# Altium PCB PSU.PcbDoc
Units mm, origin at the board's own origin, x right, y up, seen from the top; angles counter-clockwise.
Board outline 56 x 56 mm, 2 copper layers (Top Layer, Bottom Layer); 48 components, 28 nets, 158 pads, 215 vias.
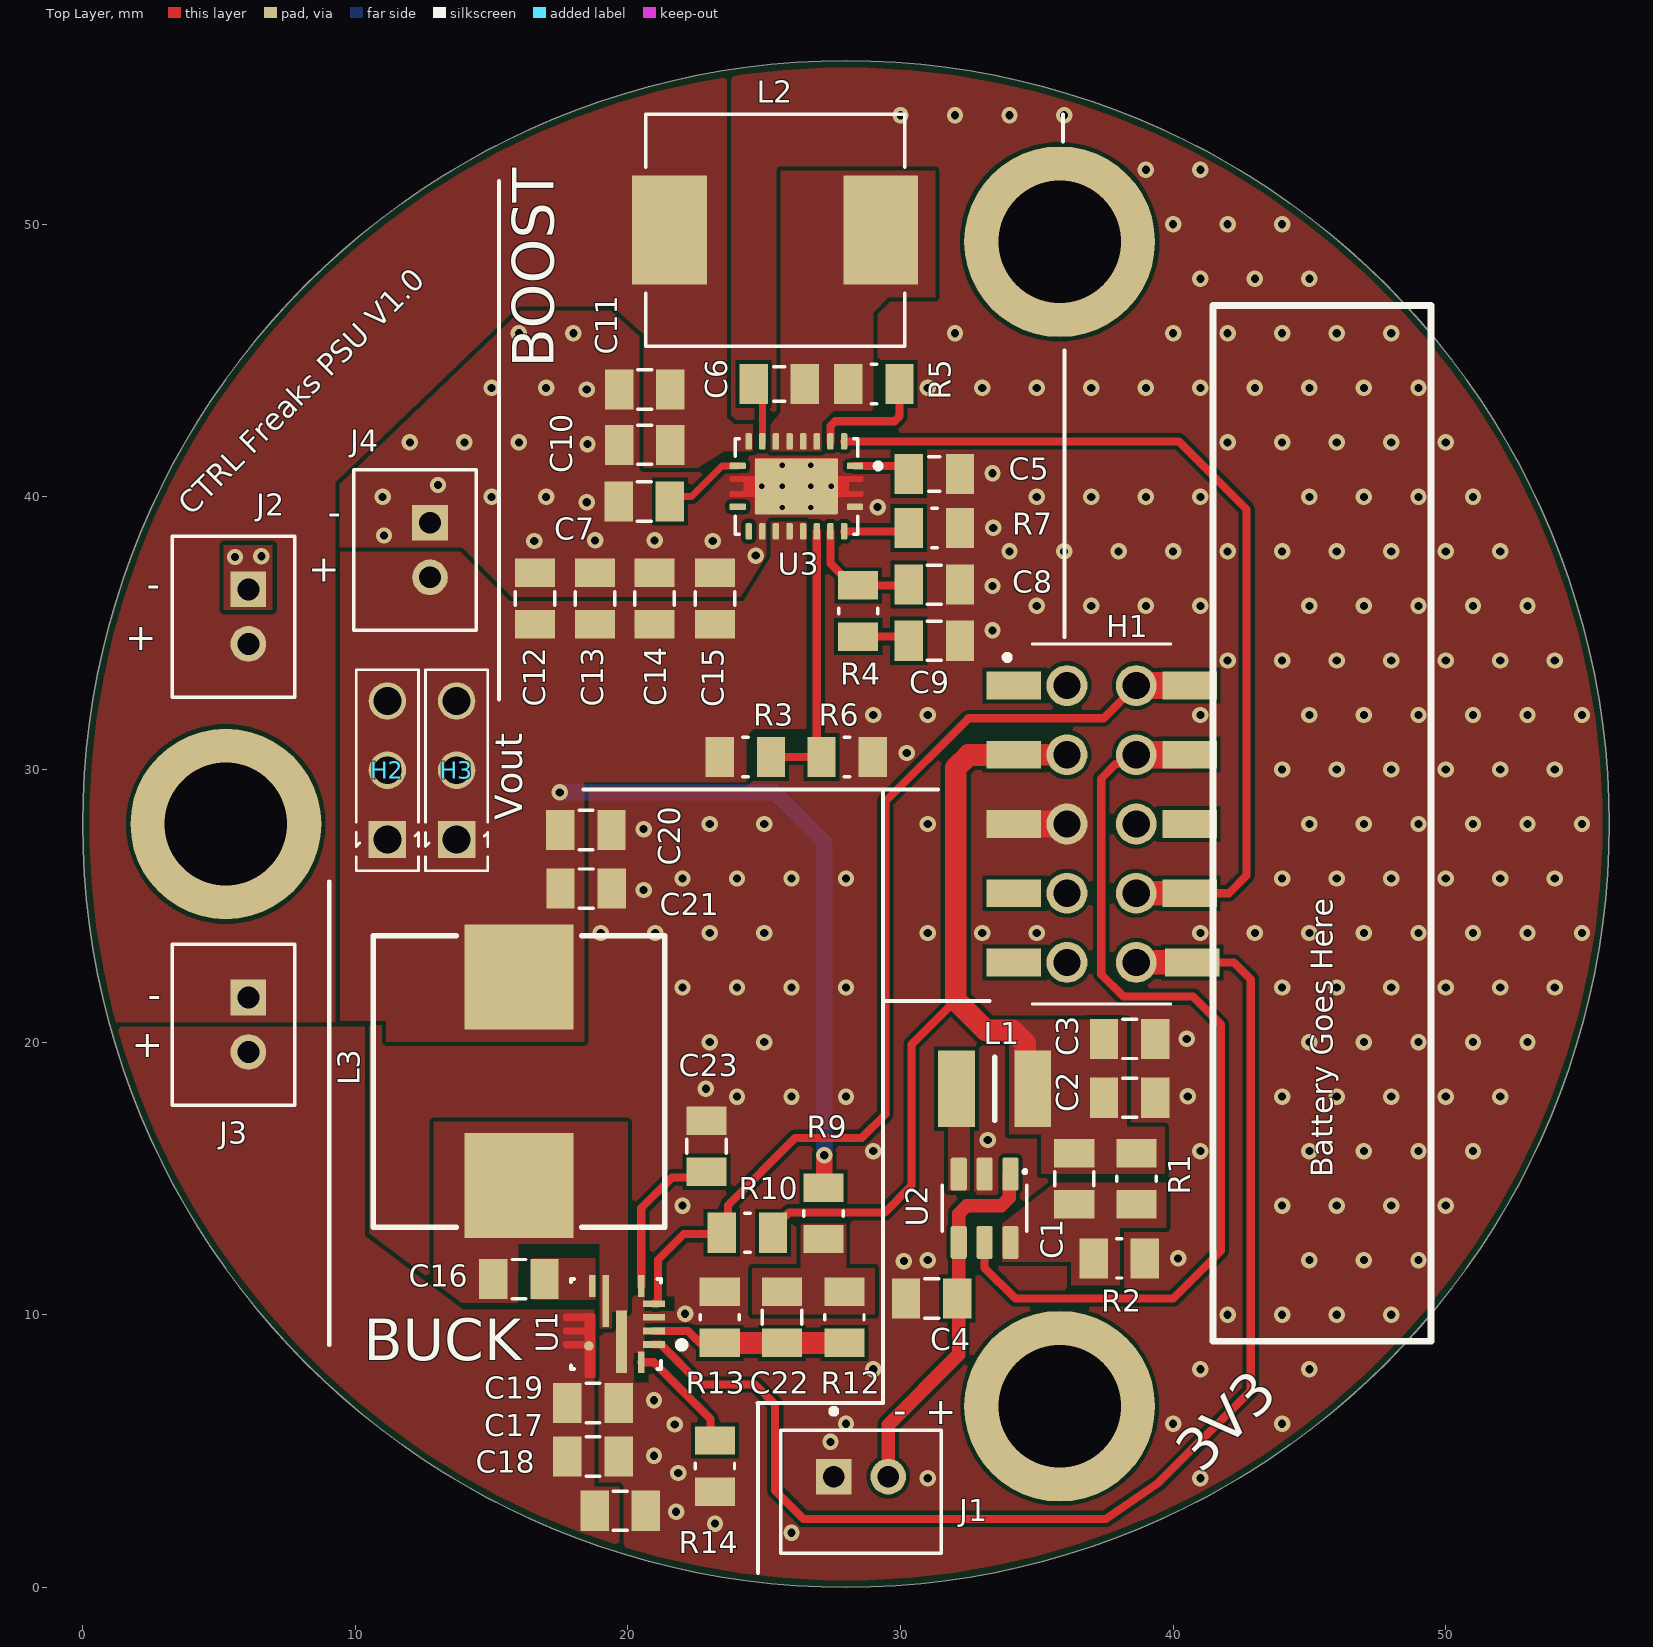
[diagram p0: Top Layer view]
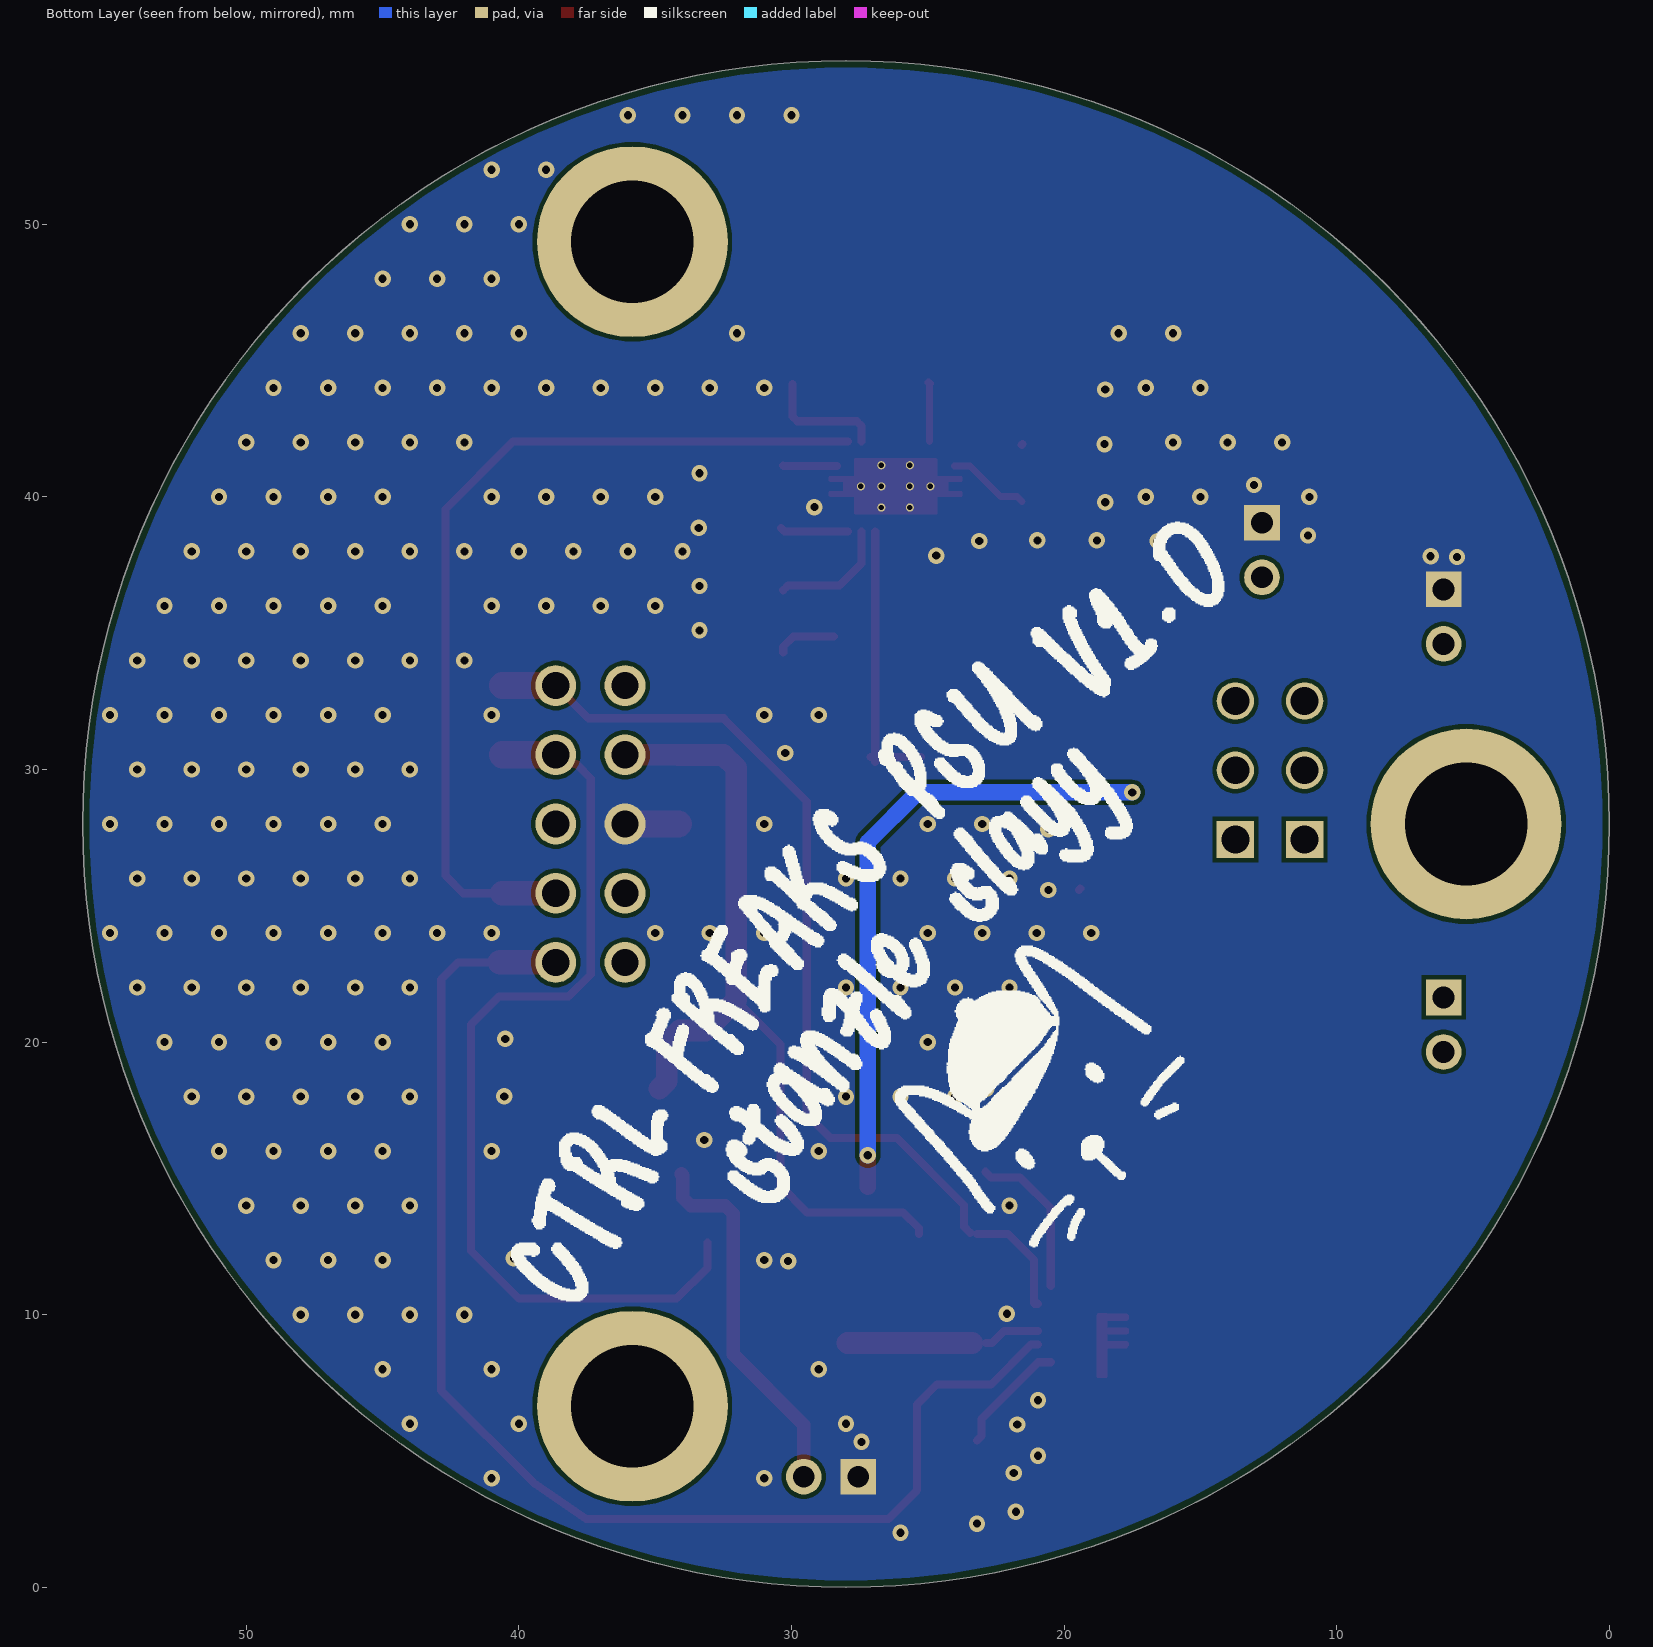
[diagram p1: Bottom Layer view, seen from below]
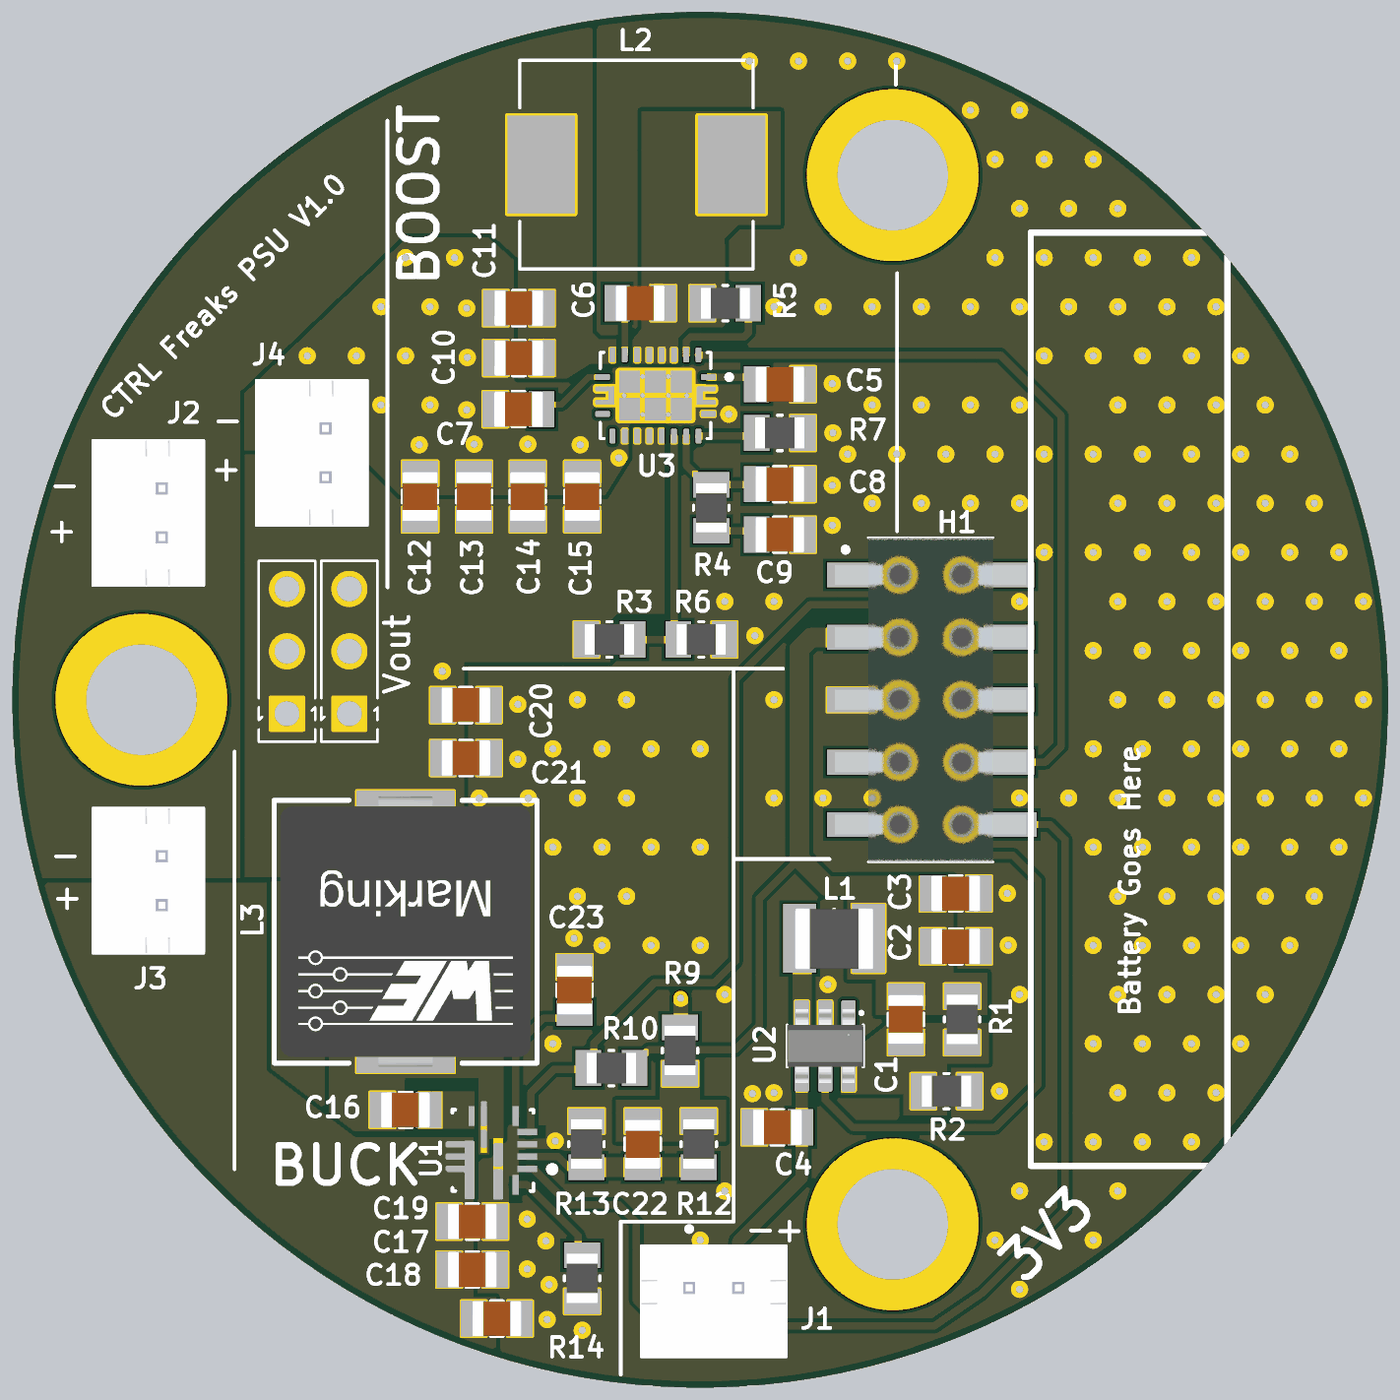
[diagram p2: 3D render of the assembled board from above, using the file's embedded part models]

## Layer stack, top to bottom
Top Solder: solder mask 0.0102, Solder Resist, Dk 3.5
Top Layer: signal copper 0.0356
Dielectric 1: dielectric 0.32, FR-4, Dk 4.8
Bottom Layer: signal copper 0.0356
Bottom Solder: solder mask 0.0102, Solder Resist, Dk 3.5

## Board outline
28,0 cw(c28,28) 0,28 cw(c28,28) 28,56 cw(c28,28) 56,28 cw(c28,28)

## Design rules (kind name [scope] priority, off if disabled: settings)
BoardOutlineClearance [All] p1: gap=0.254 ignorepadtopadclearanceinfootprint=FALSE except(0: Arc-SplitContinuation Track-SplitContinuation SMDPad-SplitContinuation THPad-SplitContinuation Via-SplitContinuation Fill-SplitContinuation Poly-SplitContinuation Region-SplitContinuation Text-SplitContinuation)
Clearance [All] p1: gap=0.152 ignorepadtopadclearanceinfootprint=FALSE
HoleSize [All] p1: absolutevalues=TRUE maxlimit=6.2 minlimit=0.3 maxpercent=80.000 minpercent=20.000
MinimumAnnularRing [All] p1: minimumring=0.15
MinimumSolderMaskSliver [All] p1: minsoldermaskwidth=0.1
PolygonConnect ViaConnect [IsVia] p1: connectstyle=Direct reliefconductorwidth=0.254 reliefentries=4 polygonreliefangle="90 Angle" airgapwidth=0.254
PolygonConnect [All] p2: connectstyle=Direct reliefconductorwidth=0.6 reliefentries=4 polygonreliefangle="90 Angle" airgapwidth=0.15
RoutingVias [All] p1: holewidth=0.3 width=0.6 viastyle="Through Hole" minholewidth=0.3 minwidth=0.5 maxholewidth=1 maxwidth=5
SilkToSilkClearance [All] p1: silktosilkclearance=0.1
SilkToSolderMaskClearance [IsPad] p1: minsilkscreentomaskgap=0.1 clearancetoexposedcopper=TRUE
SolderMaskExpansion [All] p1: expansion=0.051 istentingtop=FALSE
SupplyNets "Schematic Supply Nets_3" [InNet('Vout')] p1: voltage=0.000
SupplyNets "Schematic Supply Nets_7" [InNet('Vbat_3V7')] p2: voltage=0.000
SupplyNets "Schematic Supply Nets_6" [InNet('7V4')] p3: voltage=0.000
SupplyNets "Schematic Supply Nets_5" [InNet('3V7')] p4: voltage=0.000
SupplyNets "Schematic Supply Nets_1" [InNet('GND')] p5: voltage=0.000
SupplyNets "Schematic Supply Nets" [InNet('3V3')] p6: voltage=0.000
Width [All] p1: maxlimit=25.4 minlimit=0.15 preferedwidth=0.3
26 further rules are at their usual default settings.

## Classes and differential pairs
component class Main: C1 C2 C3 C4 C5 C6 C7 C8 C9 C10 C11 C12 C13 C14 C15 C16 C17 C18 C19 C20 C21 C22 C23 H1 H2 H3 J1 L1 L2 L3 R1 R2 R3 R4 R5 R6 R7 R9 R10 R12 R13 R14 U1 U2 U3

## Components (designator, comment, footprint, x,y, rotation, side; value= is the part's Value field where it differs from the comment)
C1 "22pF" CAPACITOR_0805_2012M-70N 36.373,14.986 r90 top
C2 "22uF" CAPACITOR_0805_2012M-70N 38.405,17.958 r180 top
C3 "22uF" CAPACITOR_0805_2012M-70N 38.405,20.117 r180 top
C4 "22uF" CAPACITOR_0805_2012M-70N 31.14,10.592 r0 top
C5 "2.2uF" CAPACITOR_0805_2012M-70N 31.242,40.843 r180 top
C6 "0.1uF" CAPACITOR_0805_2012M-70N 25.552,44.145 r180 top
C7 "47nF" CAPACITOR_0805_2012M-70N 20.6,39.827 r180 top
C8 "?" CAPACITOR_0805_2012M-70N 31.242,36.779 r0 top
C9 "?" CAPACITOR_0805_2012M-70N 31.242,34.722 r0 top
C10 "10uF" CAPACITOR_0805_2012M-70N 20.616,41.91 r180 top
C11 "0.1uF" CAPACITOR_0805_2012M-70N 20.616,43.942 r180 top
C12 "1uF" CAPACITOR_0805_2012M-70N 16.593,36.273 r90 top
C13 "22uF" CAPACITOR_0805_2012M-70N 18.789,36.273 r90 top
C14 "22uF" CAPACITOR_0805_2012M-70N 20.975,36.273 r90 top
C15 "22uF" CAPACITOR_0805_2012M-70N 23.194,36.273 r90 top
C16 "0.1uF" CAPACITOR_0805_2012M-70N 16.002,11.303 r180 top
C17 "10uF" CAPACITOR_0805_2012M-70N 18.72,4.801 r0 top
C18 "10uF" CAPACITOR_0805_2012M-70N 19.719,2.807 r0 top
C19 "0.1uF" CAPACITOR_0805_2012M-70N 18.72,6.756 r0 top
C20 "22uF" CAPACITOR_0805_2012M-70N 18.459,27.78 r0 top
C21 "22uF" CAPACITOR_0805_2012M-70N 18.466,25.629 r0 top
C22 "150pF" CAPACITOR_0805_2012M-70N 25.654,9.906 r90 top
C23 "47nF" CAPACITOR_0805_2012M-70N 22.885,16.18 r90 top
H1 "RS2BE-10-G-SMT" RS2BE10GSMT 37.377,28 r270 top locked
H2 "HDR,2.54mm,1x3" HEADER_2.54MM_1x3PIN 11.176,29.972 r90 top locked
H3 "HDR,2.54mm,1x3" HEADER_2.54MM_1x3PIN 13.716,29.972 r90 top locked
J1 "B2B-PH-K-S(LF)(SN)" JST_B2B-PH-K-S(LF)(SN) 28.55,3.505 r180 top
J2 "B2B-PH-K-S(LF)(SN)" JST_B2B-PH-K-S(LF)(SN) 5.528,35.607 r90 top
J3 "B2B-PH-K-S(LF)(SN)" JST_B2B-PH-K-S(LF)(SN) 5.528,20.636 r90 top
J4 "B2B-PH-K-S(LF)(SN)" JST_B2B-PH-K-S(LF)(SN) 12.19,38.05 r90 top
L1 "DFE322520F-2R2M=P2" INDC3225X200N 33.452,18.288 r0 top
L2 "CDMC8D28NP1R2MC" IND_CDMC8D28NP1R2MC 25.4,49.784 r0 top
L3 "3.3µH, 16.6A" WE-HCI_1050 16.002,18.557 r180 top
R1 "450k" RESISTOR_0805_2012M-50N 38.659,14.986 r90 top
R2 "100k" RESISTOR_0805_2012M-50N 38.024,12.065 r180 top
R3 "360k" RESISTOR_0805_2012M-50N 24.307,30.455 r180 top
R4 "?" RESISTOR_0805_2012M-50N 28.448,35.814 r270 top
R5 "255k" RESISTOR_0805_2012M-50N 29.022,44.145 r0 top
R6 "56k" RESISTOR_0805_2012M-50N 28.041,30.455 r180 top
R7 "100k" RESISTOR_0805_2012M-50N 31.242,38.862 r0 top
R9 "49.9" RESISTOR_0805_2012M-50N 27.178,13.716 r90 top
R10 "100k" RESISTOR_0805_2012M-50N 24.384,13.005 r0 top
R12 "73.2k" RESISTOR_0805_2012M-50N 27.94,9.906 r90 top
R13 "10k" RESISTOR_0805_2012M-50N 23.368,9.906 r270 top
R14 "52.3k" RESISTOR_0805_2012M-50N 23.19,4.445 r270 top
U1 "TPS56A37RPAR" RPA0010A-MFG 19.558,9.652 r180 top
U2 "AP3445LW6-7" SOT23-6N-1.4mm 33.086,13.904 r270 top
U3 "TPS61088RHLR" IC_TPS61088RHLR 26.179,40.386 r270 top

## Footprints (in the part's own frame and the unit in brackets; to place one, negate y for a bottom-side part, rotate by r counter-clockwise, add the part's x,y. Pads: shape width x height; smd on the part's side, far side on the other; paste and mask are expansions set on the pad)
CAPACITOR_0805_2012M-70N [mm] "Capacitor, 0805 (2012 metric), 0.7mm high, nominal pads,"
  rect 1.04x1.47 smd mask+0.051: 1(-0.94,0) 2(0.94,0)
  silkscreen extent -0.25,-0.72 0.25,0.72, body extent -1,-0.73 1,0.73, height 1.23
HEADER_2.54MM_1x3PIN [mm]
  rect 1.37x1.37 hole 1.02: 1(-2.54,0)
  round 1.37 hole 1.02: 2(0,0) 3(2.54,0)
  silkscreen extent -3.68,-1.14 3.68,1.14, body extent -3.68,-1.14 3.68,1.14, height 8.2
IC_TPS61088RHLR [mm]
  rrect42% 0.24x0.6 smd: 1(-0.75,2.15) 10(-0.75,-2.15) 11(0.75,-2.15) 20(0.75,2.15)
  rrect42% 0.6x0.24 smd: 2(-1.65,1.75) 3(-1.65,1.25) 4(-1.65,0.75) 5(-1.65,0.25) 6(-1.65,-0.25) 7(-1.65,-0.75) 8(-1.65,-1.25) 9(-1.65,-1.75) 12(1.65,-1.75) 13(1.65,-1.25) 14(1.65,-0.75) 15(1.65,-0.25) 16(1.65,0.25) 17(1.65,0.75) 18(1.65,1.25) 19(1.65,1.75)
  rrect5% 2.05x3.05 smd paste-3: 21(0,0)
  round 0.3 hole 0.2: 22(0,1.275) 23(-0.775,0.525) 24(0,0.525) 25(0.775,0.525) 26(-0.775,-0.525) 27(0,-0.525) 28(0.775,-0.525) 29(0,-1.275)
  Top Layer region: 381 vertices and 0 holes, not listed, extent -1.025,-2.45 1.025,2.45
  silkscreen extent -1.75,-2.25 1.75,3.1
IND_CDMC8D28NP1R2MC [mm]
  rect 2.75x4 smd paste+0 mask+0.102: 1(-3.875,0) 2(3.875,0)
  silkscreen extent -4.75,-4.25 4.75,4.25
INDC3225X200N [mm]
  rect 1.35x2.8 smd: 1(-1.4,0) 2(1.4,0)
  silkscreen extent 0,-1.15 0,1.15, body extent -1.6,-1.27 1.6,1.23, height 2
JST_B2B-PH-K-S(LF)(SN) [mm]
  rect 1.308x1.308 hole 0.8: 1(1,-0.55)
  round 1.308 hole 0.8: 2(-1,-0.55)
  silkscreen extent -2.95,-3.05 2.95,2.25, body extent -2.95,-2.25 2.95,2.25, height 6
RESISTOR_0805_2012M-50N [mm] "Resistor, 0805 (2012 metric), nominal pads"
  rect 1.04x1.47 smd mask+0.051: 1(-0.94,0) 2(0.94,0)
  silkscreen extent -0.1,-0.72 0.1,0.72, body extent -1,-0.63 1,0.62, height 0.5
RPA0010A-MFG [mm]
  rect 0.8x0.25 smd paste+0 mask+0: 1(-1.4,0.75) 2(-1.4,0.25) 3(-1.4,-0.25) 4(-1.4,-0.75)
  rect 0.25x0.8 smd paste+0 mask+0: 5(-0.93,-1.4) 7(0.87,-1.4) 10(-0.93,1.4)
  rect 0.25x1.9 smd paste-0.837 mask+0: 6(0.37,-0.85)
  round 0.35 smd paste+0 mask+0: 8(0.99,0.8)
  rect 0.4x2.3 smd paste-1.037 mask+0: 9(-0.21,0.65)
  Top Layer region: 1.125,1.975 0.775,1.975 0.75,1.95 0.75,-0.35 0.8,-0.4 1.15,-0.4 1.15,-0.375 1.875,-0.375 1.925,-0.325 1.925,-0.175 1.875,-0.125 1.15,-0.125 1.15,0.125 1.875,0.125 1.925,0.175 1.925,0.325 1.875,0.375 1.15,0.375 1.15,0.625 1.875,0.625 1.925,0.675 1.925,0.8 1.85,0.875 1.2,0.875 1.15,0.925 1.15,1.95
  silkscreen extent -2.54,-1.66 1.65,1.65
RS2BE10GSMT [mm]
  rect 1.02x2 smd: 1(-5.08,-3.225) 2(-5.08,3.225) 3(-2.54,-3.225) 4(-2.54,3.225) 5(0,-3.225) 6(0,3.225) 7(2.54,-3.225) 8(2.54,3.225) 9(5.08,-3.225) 10(5.08,3.325)
  round 1.5 hole 1: MH1(-5.08,-1.27) MH2(-5.08,1.27) MH3(-2.54,1.27) MH4(-2.54,-1.27) MH5(0,-1.27) MH6(0,1.27) MH7(2.54,1.27) MH8(2.54,-1.27) MH9(5.08,-1.27) MH10(5.08,1.27)
  silkscreen extent -6.6,-3.51 6.6,2.54, body extent -6.6,-3.9 6.6,3.9, height 5.15
SOT23-6N-1.4mm [mm] "SOT23, 6 pins, nominal pads, 1.4mm high"
  rrect25% 1.21x0.59 smd mask+0.051: 1(-1.255,0.95) 2(-1.255,0) 3(-1.255,-0.95) 4(1.255,-0.95) 5(1.255,0) 6(1.255,0.95)
  silkscreen extent -1.37,-1.55 0.85,1.55, body extent -1.5,-1.55 1.5,1.55, height 1.4
WE-HCI_1050 [mm] "SMT Flat Wire High Current Inductor, body 10.2x10.2mm"
  rect 4x3.85 smd: 1(0,3.825) 2(0,-3.825)
  silkscreen extent -5.35,-5.35 5.35,5.35, body extent -5.1,-5.5 5.1,5.5, height 5

## Part data
C1 C2 C3 C4: library part GRM21BR61E226ME44L, "Passive - Capacitor, 0805, 22uF Max, X5R, 25V, ±20%, -55°C ~ 85°C, 0805 (2012 Metric). 9.4uF @ 5V, 3.2uF @ 15V, 1.9uF @ 25V", Capacitance at Rated Voltage=10%, Package=0805, Rated Voltage=25V, Supplier 1 Part No.=490-GRM155R61J224KE01JCT-ND, Temp Range="-55°C ~ 85°C", Temperature Coefficient=X5R, Tolerance=±20%, APSS Standard Part="APSS Standard", MF Part No.=GRM21BR61E226ME44L, Supplier 1=Digikey
C5 C6: library part C0805C225K8PACTU, "Passive - Capacitor, X5R, 2.2uF Max, 10V, 0805 (2012 Metric), ±10%, -55°C ~ 85°C. 2uF @ 5V, 1.1uF @ 10V", Capacitance at Rated Voltage=50%, Package=0805, Rated Voltage=10V, Supplier 1 Part No.=399-C0805C225K8PACTUCT-ND, Temp Range="-55°C ~ 85°C", Temperature Coefficient=X5R, Tolerance=±10%, APSS Standard Part="APSS Standard", MF Part No.=C0805C225K8PACTU, Supplier 1=Digikey
C7 C8 C9 C10 C11 C12 C13 C14 C15 C16 C17 C18 C19 C20 C21 C22 C23: library part GRM21BR61E226ME44L, "Passive - Capacitor, Generic", Capacitance at Rated Voltage=10%, Package=0805, Rated Voltage=25V, Supplier 1 Part No.=490-GRM155R61J224KE01JCT-ND, Temp Range="-55°C ~ 85°C", Temperature Coefficient=X5R, Tolerance=±20%, APSS Standard Part="APSS Standard", MF Part No.=GRM21BR61E226ME44L, Supplier 1=Digikey
H1: "Receptacle Strip 10P 2.54mm Pitch SMT", Manufacturer_Name="Adam Tech", Geometry.Height=5.05mm, Manufacturer_Part_Number=RS2BE-10-G-SMT
H2 H3: "Connector - 2.54mm, 1x3-pin"
J1 J2 J3 J4: "Connector Header Through Hole 2 position 0.079 (2.00mm)", Package=None, Check_prices=https://www.snapeda.com/parts/B2B-PH-K-S%20(LF)(SN)/JST/view-part/?ref=eda, MF=JST, MP="B2B-PH-K-S (LF)(SN)", SnapEDA_Link=https://www.snapeda.com/parts/B2B-PH-K-S%20(LF)(SN)/JST/view-part/?ref=snap
L1: "2.2 H Shielded Wirewound Inductor 3.3 A 40mOhm Max 1210 (3225 Metric)", Manufacturer_Name="Murata Electronics", Manufacturer_Part_Number=DFE322520F-2R2M=P2, Datasheet Link=https://www.murata.com/-/media/webrenewal/support/library/catalog/products/inductor/chip/o05e.ashx?la=en-us, Geometry.Height=2mm
L2: "Inductor Power Shielded Wirewound 1.2uH 20% 1MHz 12.9A 0.007Ohm DCR T/R", Package=None, Check_prices=https://www.snapeda.com/parts/CDMC8D28NP1R2MC/Sumida/view-part/?ref=eda, MF=Sumida, MP=CDMC8D28NP1R2MC, SnapEDA_Link=https://www.snapeda.com/parts/CDMC8D28NP1R2MC/Sumida/view-part/?ref=snap
L3: library part 744325330, "WE-HCI SMT Flat Wire High Current Inductor, size 1050, 3.3µH, 16.6A, 5.9mΩ", Case/Size Code=1050, DC Resistance=5.9mΩ, Inductance=3.3µH, Manufacturer="Wurth Elektronik", Operating Temperature Max=150°C, Operating Temperature Min=-40°C, Performance Rated Current=16.6A, Saturation Current=15A, Self Resonant Frequency=54MHz, Category="Shielded Power Inductors", ComponentLink1Description="Website Link", ComponentLink1URL=https://www.we-online.com/redexpert/article/744325330?ad, ComponentLink2Description="Datasheet Link", ComponentLink2URL=https://www.we-online.com/redexpert/spec/744325330?ad, Height=4.7mm, Length=10.2mm, Manufacturer Part Number=744325330, Match Code=WE-HCI, Material=Superflux, Mount="Surface Mount", Packaging="Tape and Reel", Width=10.2mm
R1 R2 R3 R4 R5 R6 R7 R9 R10 R12 R13 R14: library part "Generic Resistor", "Passive - Resistor, Generic", Tolerance=?%
U1: "4.5V to 28V input, 10A synchronous buck converter 10-VQFN-HR -40 to 150", Manufacturer_Name="Texas Instruments", Copyright="Copyright (C) 2026 Ultra Librarian. All rights reserved.", Datasheet=https://www.ti.com/lit/gpn/tps56a37, Manufacturer_Part_Number=TPS56A37RPAR, RefDes=RefDes, Type=TYPE
U2: "IC - Regulator, Buck, 2A, 2.7V to 5.5V In, 0.6V to Vin Out, SOT23-6", Package=SOT-23-5, Rated Voltage=5.5V, Supplier 1 Part No.=AP3445LW6-7DICT-ND, Temp Range="-40°C ~ 85°C (TA)", APSS Standard Part="APSS Standard", MF Part No.=AP3445LW6-7, Supplier 1=Digikey
U3: Package=None, Availability=Unavailable, MP=TPS61088RHLR, Price=None

## Free pads (board coordinates)
  round 7 hole 4.5: 1(5.25,28) 1(35.837,6.643) 1(35.837,49.357)

## Via types
v1: diameter 0.6, hole 0.3, Top Layer to Bottom Layer, 215 vias

## Nets (pads, with @x,y where several pads share a name; then routed paths per layer and width w, separated by ;. In a path a pad name is that pad's centre, name@x,y a point inside that pad or via, vN(x,y) a via of type N, cw(c..) or ccw(c..) an arc to the next point about the centre after c; other vN are vias at no path point)
3V3: C1.2 C2.2 C3.2 H1.3 H1.MH4 L1.2 R1.2 R10.2 | length 31.2
  Top Layer w0.3: R10.2@25.324,12.954 25.324,13.169 25.908,13.753 29.425,13.753 30.404,14.732 30.404,19.914 32.029,21.539
  Top Layer w0.8: H1.3@34.14,30.528 32.498,30.528 32.029,30.06 32.029,21.539 33.147,20.422 34.108,20.422 34.577,19.953 34.577,18.563 L1.2 ; H1.3 H1.MH4
3V3_PG: H1.4 H1.MH3 U2.5 | length 35
  Top Layer w0.3: U2.5 33.086,11.72 34.214,10.592 40.005,10.592 41.758,12.344 41.758,20.642 40.734,21.666 38.176,21.666 37.363,22.479 37.363,29.667 37.893,30.197 37.979,30.197 38.322,30.54 H1.MH3
  Top Layer w1: H1.MH3 H1.4
3V7: C10.1 C11.1 J2.2 J3.1 L2.1 U3.9 | length 0
  Top Layer w0.3: C10.1@21.525,41.941 C10.1
7V4: C17.1 C18.1 C19.1 J3.2 U1.8
Buck_PG: H1.2 H1.MH2 R10.1 U1.4 | length 36.9
  Top Layer w0.3: U1.4 21.083,10.402 21.108,10.427 21.108,12.015 22.047,12.954 R10.1@23.19,12.954 ; R10.1 23.666,13.227 23.666,14.014 26.137,16.485 28.575,16.485 29.439,17.348 29.439,28.829 32.487,31.877 37.444,31.877 H1.MH2
  Top Layer w1: H1.MH2 H1.2
EN_BOOST: H1.8 H1.MH7 U3.2 | length 33.6
  Top Layer w0.3: U3.2 40.209,42.036 42.697,39.548 42.697,26.111 42.046,25.46 H1.8
  Top Layer w0.9: H1.MH7 H1.8
EN_BUCK: H1.10 H1.MH10 U1.1 | length 47.7
  Top Layer w0.3: U1.1 21.206,8.902 22.672,7.436 24.67,7.436 25.4,6.706 25.4,3.556 26.446,2.51 37.529,2.51 39.468,3.835 42.85,7.217 42.85,22.301 42.231,22.92 H1.10
  Top Layer w0.9: H1.MH10 H1.10
GND: C2.1 C3.1 C4.1 C5.1 C7.2 C8.2 C9.2 C10.2 C11.2 C12.2 C13.2 C14.2 C15.2 C17.2 C18.2 C19.2 C20.2 C21.2 C23.2 H1.5 H1.MH5 J1.1 J2.1 J4.1 R2.1 R6.1 R7.2 R13.1 R14.2 U1.3 U1.9 U2.2 U3.13 U3.20 U3.21 U3.22 U3.23 U3.24 U3.25 U3.26 U3.27 U3.28 U3.29 | length 2
  Top Layer w0.3: C20.2 C20.2@19.407,27.788 ; C21.2 C21.2@19.457,25.578
  Top Layer w1: H1.5 H1.MH5
  other v1: 26,2 23.197,2.333 21.768,2.769 31,4 41,4 21.844,4.191 20.955,4.826 27.432,5.334 21.717,5.969 28,6 40,6 44,6 20.955,6.858 29,8 41,8 45,8 42,10 44,10 46,10 48,10 22.098,10.033 30.124,11.963 31,12 45,12 47,12 49,12 40.183,12.065 22,14 44,14 46,14 48,14 50,14 29,16 41,16 45,16 47,16 49,16 51,16 33.198,16.408 24,18 26,18 28,18 40.538,18.009 44,18 46,18 48,18 50,18 52,18 22.86,18.288 23,20 25,20 45,20 47,20 49,20 51,20 53,20 40.502,20.117 22,22 24,22 26,22 28,22 44,22 46,22 48,22 50,22 52,22 54,22 19,24 21,24 23,24 25,24 31,24 33,24 35,24 41,24 43,24 45,24 47,24 49,24 51,24 53,24 55,24 20.574,25.578 22,26 24,26 26,26 28,26 44,26 46,26 48,26 50,26 52,26 54,26 20.574,27.813 23,28 25,28 31,28 45,28 47,28 49,28 51,28 53,28 55,28 44,30 46,30 48,30 50,30 52,30 54,30 30.226,30.607 29,32 31,32 41,32 45,32 47,32 49,32 51,32 53,32 55,32 42,34 44,34 46,34 48,34 50,34 52,34 54,34 33.376,35.103 35,36 37,36 39,36 41,36 45,36 47,36 49,36 51,36 53,36 33.376,36.728 5.588,37.795 6.553,37.821 24.689,37.846 34,38 36,38 38,38 40,38 42,38 44,38 46,38 48,38 50,38 52,38 16.561,38.379 23.114,38.379 18.796,38.405 20.98,38.405 11.049,38.583 33.401,38.862 29.159,39.624 18.491,39.802 11,40 15,40 17,40 35,40 37,40 39,40 41,40 45,40 47,40 49,40 51,40 13.03,40.437 33.375,40.869 18.517,41.935 12,42 14,42 16,42 42,42 44,42 46,42 48,42 50,42 18.491,43.942 15,44 17,44 31,44 33,44 35,44 37,44 39,44 41,44 43,44 45,44 47,44 49,44 16,46 18,46 32,46 40,46 42,46 44,46 46,46 48,46 41,48 43,48 45,48 40,50 42,50 44,50 39,52 41,52 30,54 32,54 34,54 36,54
NetC1_1: C1.1 R1.1 R2.2 U2.6
NetC5_2: C5.2 U3.1 | length 2
  Top Layer w0.3: U3.1 30.29,41.136 C5.2@30.302,41.148
NetC6_2: C6.2 U3.8 | length 2.2
  Top Layer w0.256: U3.8 C6.2@24.929,44.157
  Top Layer w0.3: C6.2@24.929,44.157 C6.2@24.968,44.196
NetC7_1: C7.1 U3.10 | length 3
  Top Layer w0.256: C7.1 21.725,40.012 22.334,40.012 23.458,41.136 U3.10
NetC8_1: C8.1 R4.1 U3.18 | length 4.5
  Top Layer w0.3: U3.18 27.429,37.558 28.233,36.754 R4.1 30.124,36.754 C8.1@30.302,36.576
NetC9_1: C9.1 R4.2 | length 2.2
  Top Layer w0.3: R4.2 29.932,34.874 30.302,34.504 C9.1@30.302,34.29
NetC16_1: C16.1 U1.7
NetC16_2: C16.2 L3.1 U1.6
NetC22_1: C22.1 R12.1 R13.2 U1.2 | length 6.7
  Top Layer w0.3: U1.2 22.209,9.402 22.645,8.966 R13.2@22.86,8.966
  Top Layer w0.8: R13.2 C22.1 R12.1
NetC22_2: C22.2 R9.1 R12.2
NetC23_1: C23.1 U1.5 | length 5.8
  Top Layer w0.3: U1.5 20.488,13.909 21.615,15.037 22.682,15.037 C23.1
NetL1_1: L1.1 U2.3
NetR3_1: R3.1 R6.2 U3.17 | length 10.3
  Top Layer w0.3: R3.1 R6.2@26.929,30.455 ; R6.2@26.929,30.277 R6.2@26.929,30.455 ; U3.17 R6.2@26.929,30.455 ; R6.2 R6.2@26.929,30.455
NetR5_2: R5.2 U3.3 | length 4.4
  Top Layer w0.3: U3.3 27.429,42.598 27.605,42.774 29.786,42.774 29.962,42.949 R5.2
NetR7_1: R7.1 U3.19 | length 2.5
  Top Layer w0.3: U3.19 30.252,38.736 R7.1@30.378,38.862
NetR14_1: R14.1 U1.10 | length 4.3
  Top Layer w0.3: U1.10 20.958,8.252 23.031,6.179 23.031,5.544 R14.1
SW: C6.1 L2.2 R5.1 U3.4 U3.5 U3.6 U3.7
Vbat: H1.9
Vbat_3V7: C4.2 J1.2 U2.1 U2.4 | length 13.7
  Top Layer w0.5: J1.2 29.55,5.954 32.131,8.535 32.131,10.668 32.136,10.673 U2.4 32.136,13.703 32.429,13.995 33.698,13.995 33.991,14.288 33.991,15.114 U2.1
Vout: C12.1 C13.1 C14.1 C15.1 C20.1 C21.1 H2.1 H2.2 H2.3 H3.1 H3.2 H3.3 J4.2 L3.2 R3.2 R9.2 U3.14 U3.15 U3.16 | length 23.1
  Top Layer w0.3: R9.2 R9.2@27.203,14.681
  Top Layer w0.6: R9.2@27.203,14.681 v1(27.203,15.85)
  Bottom Layer w0.6: v1(17.501,29.159) 25.375,29.159 27.203,27.33 v1(27.203,15.85)
pads on no net: H1.1 H1.6 H1.7 H1.MH1 H1.MH6 H1.MH8 H1.MH9 U3.11 U3.12

## Polygon pours and split planes (outlines as drawn)
GND on Top Layer "GND_L01_P039" (solid, pour order 39): 28,0 cw(c28,28) 0,28 cw(c28,28) 28,56 cw(c28,28) 56,28 cw(c28,28)
3V7 on Top Layer "3V7_L01_P031" (solid, pour order 31): 23.622,42.926 23.901,42.672 24.587,42.672 24.587,41.681 23.535,41.681 22.569,41.072 20.574,41.072 20.574,45.974 19.431,46.99 16.002,46.99 9.271,40.538 9.271,20.726 0.381,20.726 0,21.107 0,56 23.622,56
7V4 on Top Layer "7V4_L01_P026" (solid, pour order 26): 0,20.561 0.544,17.323 1.23,14.503 12.298,1.473 19.684,1.473 19.684,3.683 18.771,3.683 18.771,10.185 13.963,10.185 10.348,12.903 10.348,20.561
Vout on Top Layer "VOUT_L01_P024" (solid, pour order 24): 26.543,39.091 26.543,31.496 24.613,31.496 24.333,31.217 24.333,29.54 14.935,29.54 14.935,26.086 14.859,26.01 9.449,26.01 9.449,37.986 13.856,37.986 15.672,36.17 24.232,36.17 25.248,37.802 25.248,39.091
GND on Top Layer "GND_L01_P021" (solid, pour order 21): 5.182,35.865 6.96,35.865 6.96,38.227 5.182,38.227
NetC16_2 on Top Layer "NETC16_2_L01_P027" (solid, pour order 27): 15.956,10.439 13.861,10.439 12.878,11.151 12.878,17.069 19.99,17.069 19.99,9.957 19.533,9.5 18.974,9.5 18.974,12.598 15.977,12.598
NetC16_1 on Top Layer "NETC16_1_L01_P028" (solid, pour order 28): 18.809,10.541 16.497,10.541 16.497,12.065 18.809,12.065
Vout on Top Layer "VOUT_L01_P030" (solid, pour order 30): 9.449,33.985 9.449,20.777 11.125,20.777 11.125,20.015 18.39,20.015 18.39,30.019 14.376,33.985
NetC22_2 on Top Layer "NETC22_2_L01_P033" (solid, pour order 33): 24.562,11.709 24.562,10.008 29.058,10.008 29.058,11.709 28,11.709 28,13.335 26.391,13.335 26.34,13.284 26.34,11.709
3V3 on Top Layer "3V3_L01_P034" (solid, pour order 34): 33.985,20.828 33.985,16.612 35.154,16.612 35.154,15.164 39.7,15.164 39.7,16.891 38.303,16.891 38.303,20.828
NetL1_1 on Top Layer "NETL1_1_L01_P035" (solid, pour order 35): 32.537,14.541 32.537,18.479 31.75,18.479 31.75,14.541
NetC1_1 on Top Layer "NETC1_1_L01_P037" (solid, pour order 37): 33.731,13.335 33.731,11.938 36.271,11.938 36.271,11.074 38.049,11.074 38.049,13.183 39.751,13.183 39.751,14.834 35.662,14.834
SW on Top Layer "SW_L01_P038" (solid, pour order 38): 25.603,43.104 25.248,42.672 25.248,41.681 27.102,41.681 27.102,42.723 27.559,43.155 29.007,43.155 29.002,46.764 29.558,47.32 31.267,47.32 31.267,51.968 25.603,51.968
GND on Bottom Layer "GND_Bottom" (solid, pour order 20): 28,0 ccw(c28,28) 56,28 ccw(c28,28) 28,56 ccw(c28,28) 0,28 ccw(c28,28)

## Silkscreen, mask and mechanical layers (free items; w line width, h text height)
Top Overlay:
  lines w0.15: 9.042,8.89 9.042,25.89 ; 15.265,32.578 15.265,51.578 ; 18.369,29.261 31.369,29.261 ; 24.762,6.756 29.362,6.756 29.362,29.156 ; 24.765,0.531 24.765,6.731 ; 29.362,21.514 33.262,21.514 ; 35.966,53.031 35.966,54.031 ; 36.017,34.864 36.017,45.364
  lines w0.254: 41.46,9.025 49.46,9.025 49.46,47.025 41.46,47.025 41.46,9.025
  text "BOOST" at 17.272,44.729 h1.52 r90
  text "-" at 9.477,39.72 h1 r180
  text "CTRL Freaks PSU V1.0" at 3.988,39.277 h0.8 r45
  text "+" at 9.426,37.736 h1 r180
  text "-" at 2.847,37.078 h1 r180
  text "+" at 2.72,35.221 h1 r180
  text "Vout" at 16.128,28.132 h1 r90
  text "-" at 2.873,22.016 h1 r180
  text "+" at 2.949,20.286 h1 r180
  text "Battery Goes Here" at 45.865,15.038 h0.8 r90
  text "BUCK" at 10.312,8.331 h1.52
  text "-" at 29.741,6 h1
  text "+" at 30.909,5.978 h1
  text "3V3" at 41.021,4.118 h1.52 r45
Bottom Overlay:
  drawing of 37 lines, arcs and shapes, not listed
Board Outline:
  the board outline again, w0.1